# EAGLE board OoffAttSMD (EAGLE 9.3.0)
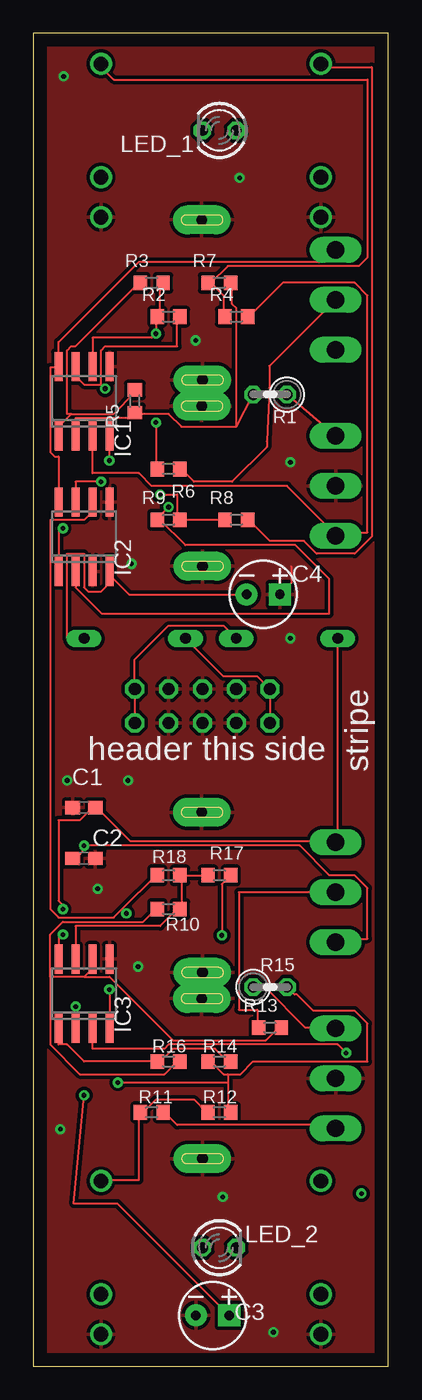
[diagram p0: board, top side]
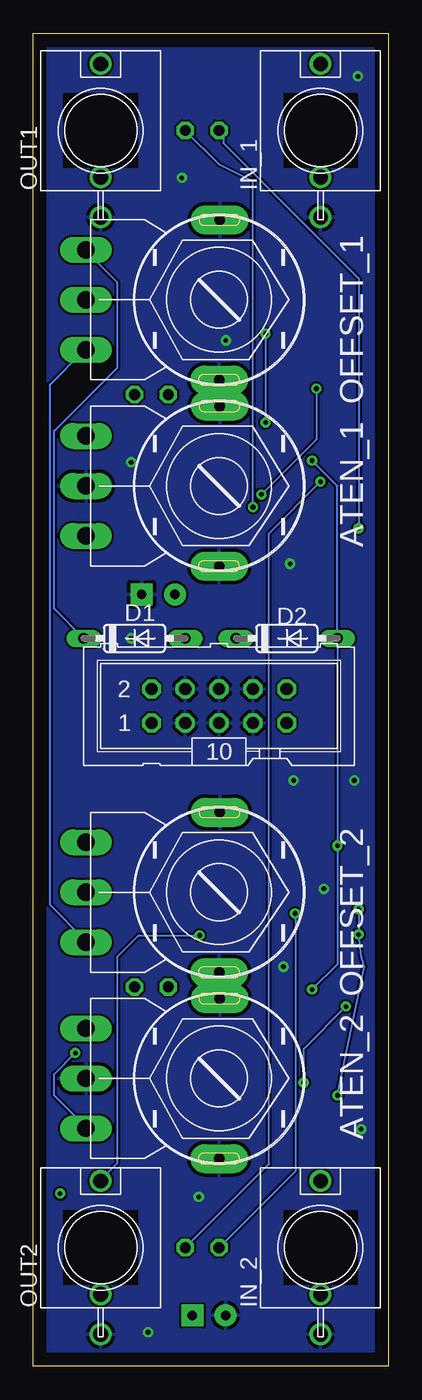
[diagram p1: board, bottom side, seen from below]

Size 26.65 x 100 mm. Coordinates in mm from the lower left corner, seen from the top.
Outline: 0,0 26.65,0 26.65,100 0,100 0,0
Copper layers (1*16): Top 0.035mm / dielectric 1.5mm / Bottom 0.035mm
Design rules "default": minimum track width 6mil, minimum drill 0.35mm, track to track 6mil, track to pad 6mil, pad to pad 6mil, via to via 6mil, smd to smd 6mil, copper to edge 40mil, drill to drill 6mil, minimum pad ring 10mil, minimum via ring 8mil, stop-mask expansion 4mil, vias tented up to drill 0mil, thermal gap 10mil

## Footprints (pad centres in the part's own frame; a part is rotated, then mirrored left to right if it is on the bottom)
R121N = drill 0.8 pad 2.184 long: C1 -5.995,0.051; C2 6.021,0 | drill 1.3 pad 1.778 long: PIN1 -3.75,-10; PIN2 0,-10; PIN3 3.75,-10
C0603 = smd 1.1 x 1: 1 -0.85,0; 2 0.85,0
CPOL-RADIAL-2.5MM-5MM = drill 0.7 pad 1.651 square: 1 1.25,0 | drill 0.7 pad 1.651: 2 -1.25,0
DO35-7 = drill 0.813 long: A 3.81,0; C -3.81,0
SO08 = smd 0.6 x 2.2: 1 -1.905,-2.6; 2 -0.635,-2.6; 3 0.635,-2.6; 4 1.905,-2.6; 5 1.905,2.6; 6 0.635,2.6; 7 -0.635,2.6; 8 -1.905,2.6
WQP-PJ301M-12_JACK = drill 1.1: P$1 0,5; P$2 0,-3.5; P$3 0,-6.5
LED3MM = drill 0.813 octagon: A -1.27,0; K 1.27,0
ML10 = drill 0.914 octagon: 1 -5.08,-1.27; 2 -5.08,1.27; 3 -2.54,-1.27; 4 -2.54,1.27; 5 0,-1.27; 6 0,1.27; 7 2.54,-1.27; 8 2.54,1.27; 9 5.08,-1.27; 10 5.08,1.27
0207/2V = drill 0.813 octagon: 1 -1.27,0; 2 1.27,0
R0603 = smd 1 x 1.1: 1 -0.85,0; 2 0.85,0

## Placement (x,y rotation side)
ATEN_1  R1212NPADS_GRANDES  [R121N]  12.7,66.04 270 bottom
ATEN_2  R1212NPADS_GRANDES  [R121N]  12.7,21.59 270 bottom
C1  100n  [C0603]  3.81,41.91 0 top
C2  100n  [C0603]  3.81,38.1 0 top
C3  10uF  [CPOL-RADIAL-2.5MM-5MM]  13.46,3.81 0 top
C4  10uF  [CPOL-RADIAL-2.5MM-5MM]  17.27,57.91 0 top
D1  [DO35-7]  19.05,54.61 0 bottom
D2  [DO35-7]  7.62,54.61 0 bottom
IC1  TL072D  [SO08]  3.81,72.39 0 top
IC2  TL072D  [SO08]  3.81,62.23 0 top
IC3  TL072D  [SO08]  3.81,27.94 0 top
IN_1  WQP-PJ301M-12_JACK  [WQP-PJ301M-12_JACK]  5.08,92.71 0 bottom
IN_2  WQP-PJ301M-12_JACK  [WQP-PJ301M-12_JACK]  5.08,8.89 0 bottom
LED_1  [LED3MM]  13.97,92.71 180 top
LED_2  [LED3MM]  13.97,8.89 0 top
OFFSET_1  R1212NPADS_GRANDES  [R121N]  12.7,80.01 270 bottom
OFFSET_2  R1212NPADS_GRANDES  [R121N]  12.7,35.56 270 bottom
OUT1  WQP-PJ301M-12_JACK  [WQP-PJ301M-12_JACK]  21.59,92.71 0 bottom
OUT2  WQP-PJ301M-12_JACK  [WQP-PJ301M-12_JACK]  21.59,8.89 0 bottom
POWER  [ML10]  12.7,49.53 0 bottom
R1  43k  [0207/2V]  17.78,72.9 180 top
R2  10k  [R0603]  10.16,78.74 0 top
R3  10k  [R0603]  8.89,81.28 0 top
R4  100k  [R0603]  15.24,78.74 0 top
R5  100k  [R0603]  7.62,72.39 90 top
R6  10k  [R0603]  10.16,67.31 180 top
R7  100k  [R0603]  13.97,81.28 0 top
R8  1k  [R0603]  15.24,63.5 0 top
R9  3k  [R0603]  10.16,63.5 0 top
R10  10k  [R0603]  10.16,34.29 0 top
R11  100k  [R0603]  8.89,19.05 0 top
R12  100k  [R0603]  13.97,19.05 0 top
R13  10k  [R0603]  17.78,25.4 0 top
R14  100k  [R0603]  13.97,22.86 0 top
R15  43k  [0207/2V]  17.78,28.45 0 top
R16  10k  [R0603]  10.16,22.86 0 top
R17  1k  [R0603]  13.97,36.83 0 top
R18  3k  [R0603]  10.16,36.83 0 top

## Library data of the parts
ATEN_1 ATEN_2 OFFSET_1 OFFSET_2 = pot_12mm_r1212n
C1 C2 R1 R15 = resistor
C3 C4 = SparkFun-Capacitors; PROD_ID: CAP-08440
D1 D2 = diode
IC1-IC3 = linear
IN_1 IN_2 OUT1 OUT2 = thonkiconn
LED_1 LED_2 = led
POWER = con-ml; OC_FARNELL: unknown; OC_NEWARK: unknown
R2-R14 R16-R18 = adafruit

## Nets
+12V: C1.2 C3.1 D1.C IC1.8 IC2.8 IC3.8 OFFSET_1.PIN1 OFFSET_2.PIN1
-12V: C2.1 C4.2 D2.A IC1.4 IC2.4 IC3.4 OFFSET_1.PIN3 OFFSET_2.PIN3
GND: ATEN_1.C1 ATEN_1.C2 ATEN_1.PIN2 ATEN_2.C1 ATEN_2.C2 ATEN_2.PIN2 C1.1 C2.2 C3.2 C4.1 IC1.5 IC2.3 IC2.5 IC3.5 IN_1.P$3 IN_2.P$3 OFFSET_1.C1 OFFSET_1.C2 OFFSET_2.C1 OFFSET_2.C2 OUT1.P$3 OUT2.P$3 POWER.3 POWER.4 POWER.5 POWER.6 POWER.7 POWER.8
N$1: D1.A POWER.9 POWER.10
N$2: D2.C POWER.1 POWER.2
N$3: IC2.1 LED_1.K
N$4: IC3.2 R12.2 R14.1 R15.2
N$5: ATEN_2.PIN3 IC3.3 R11.2
N$6: IC3.1 R14.2 R16.1
N$7: IN_2.P$1 R11.1 R12.1
N$8: IC3.6 R10.1 R13.2 R16.2
N$9: IC3.7 R10.2 R17.1 R18.2
N$10: OFFSET_2.PIN2 R13.1
N$11: ATEN_2.PIN1 R15.1
N$12: OUT2.P$1 R17.2
N$13: IC1.2 R1.2 R5.1 R7.2
N$14: OUT1.P$1 R8.2
N$16: ATEN_1.PIN3 IC1.3 R4.2
N$17: IC2.7 LED_2.K
N$18: IC2.6 LED_2.A R18.1
N$36: IC2.2 LED_1.A R9.1
N$61: ATEN_1.PIN1 R1.1
N$62: IC1.1 R3.1 R5.2
N$63: IN_1.P$1 R4.1 R7.1
N$64: IC1.6 R2.1 R3.2 R6.2
N$65: IC1.7 R2.2 R8.1 R9.2
N$68: OFFSET_1.PIN2 R6.1

## Tracks (layer width: path | path; a pad name or v marks a point on that pad's centre or on a via)
+12V  (via drill 0.35)
  Top 0.152: IC2.8 1.91,68.26 1.59,68.26 1.27,68.58 1.27,74.93 1.91,74.93 IC1.8 1.91,76.83 7.94,82.87 21.91,82.87 22.54,83.5 OFFSET_1.PIN1 | IC3.8 1.91,32.38 v2.22,32.38 | v2.22,34.29 2.22,34.35 2.22,34.61 1.91,34.92 1.91,40.96 3.49,40.96 4.45,41.91 C1.2 4.76,41.91 7.3,39.37 22.54,39.37 OFFSET_2.PIN1 22.86,39.37 D1.C | C3.1 6.33,12.19 3.05,12.19 v3.81,20.32
  Bottom 0.152: v2.22,34.29 v2.22,32.38 2.03,30.73 1.78,29.97 v3.81,20.32 | D1.C 25.08,56.83 25.08,70.17 20.32,74.93 20.32,81.28 22.54,83.5 OFFSET_1.PIN1
-12V  (via drill 0.35)
  Top 0.152: C4.2 7.18,57.91 6.03,59.05 | 6.03,59.05 5.71,59.37 IC2.4 | v5.71,28.26 IC3.4 | v5.71,67.94 IC1.4 | 6.03,59.05 5.08,58.1 4.13,58.1 3.81,58.42 3.81,60.96 2.54,60.96 2.54,54.61 D2.A | 4.13,39.05 3.17,38.1 C2.1 | 4.13,39.05 20,39.05 22.23,36.83 24.13,36.83 25.08,35.88 25.08,32.07 22.86,32.07 OFFSET_2.PIN3 | 4.13,39.05 v3.81,39.05
  Bottom 0.152: v5.71,28.26 3.81,30.16 v3.81,39.05 D2.A 3.81,66.04 v5.71,67.94 | OFFSET_1.PIN3 22.86,76.2 25.4,73.66 25.4,34.61 22.86,32.07 OFFSET_2.PIN3
GND  (via drill 0.35)
  Top 0.152: 19.37,60.01 19.37,58.76 C4.1 | 5.71,74.93 IC1.5 | 3.17,41.91 C1.1 | 12.83,3.81 C3.2 | 5.71,30.48 IC3.5
  other vias: 4.83,35.81 2.54,43.94 7.11,43.94 7.87,29.97 2.03,17.78 14.22,12.7 18.03,2.54 19.3,54.61 19.3,67.82 12.19,76.96 15.49,89.15 2.29,96.77 7.37,60.2
  pour Top (isolate 0.254): 0,100.33 26.67,100.33 26.67,0 0,0
  pour Bottom: 0,100.33 26.67,100.33 26.67,0 0,0
N$1
  Top 0.152: D1.A 14.29,55.56 10.16,55.56 7.62,53.02 POWER.10 POWER.9
N$2
  Top 0.152: D2.C 14.29,51.75 16.83,51.75 POWER.2 POWER.1
N$3  (via drill 0.35)
  Top 0.152: IC2.1 1.91,62.87 v2.22,62.87
  Bottom 0.152: v2.22,62.87 2.22,81.6 12.38,91.76 12.38,92.39 LED_1.K
N$4  (via drill 0.35)
  Top 0.152: 14.61,21.91 14.61,21.27 | 14.61,21.27 14.61,19.05 R12.2 | 14.61,21.91 14.29,21.91 13.34,22.86 R14.1 | 14.61,21.91 15.56,21.91 16.51,22.86 25.08,22.86 25.08,25.72 24.13,26.67 21.02,26.67 19.81,27.88 19.62,27.88 R15.2 | v3.17,26.99 IC3.2 | 14.61,21.27 v6.35,21.27
  Bottom 0.152: v3.17,26.99 6.35,23.81 v6.35,21.27
N$5  (via drill 0.35)
  Top 0.152: R11.2 9.84,19.05 10.79,18.1 22.54,18.1 ATEN_2.PIN3 | IC3.3 4.45,23.81 9.84,23.81 10.16,24.13 22.86,24.13 v23.5,23.5
  Bottom 0.152: v23.5,23.5 25.08,21.91 25.08,20.32 22.86,18.1 ATEN_2.PIN3
N$6
  Top 0.152: R14.2 14.61,22.86 13.65,23.81 10.48,23.81 9.53,22.86 R16.1 3.81,22.86 2.54,24.13 1.91,24.13 IC3.1
N$7
  Top 0.152: IN_2.P$1 5.08,13.97 7.94,13.97 7.94,19.05 R11.1 8.26,19.05 9.21,20 12.06,20 13.02,19.05 R12.1
N$8
  Top 0.152: 1.27,29.21 1.27,32.38 2.22,33.34 8.26,33.34 9.21,34.29 R10.1 | 3.81,29.21 1.27,29.21 | 3.81,29.21 4.45,29.84 IC3.6 | 1.27,29.21 1.27,24.13 3.49,21.91 9.84,21.91 10.79,22.86 R16.2 | 3.81,29.21 5.71,29.21 10.48,24.45 17.46,24.45 18.41,25.4 R13.2
N$9
  Top 0.152: 11.11,36.83 11.11,34.29 R10.2 10.79,34.29 9.53,33.02 3.17,33.02 IC3.7 | 11.11,36.83 R17.1 | 11.11,36.83 R18.2
N$10
  Top 0.152: OFFSET_2.PIN2 15.43,35.56 15.43,26.73 16.83,26.73 16.83,25.4 R13.1
N$11
  Top 0.152: R15.1 17.4,28.45 20.45,25.4 22.54,25.4 ATEN_2.PIN1
N$12  (via drill 0.35)
  Top 0.152: R17.2 14.16,36.17 v14.16,32.32
  Bottom 0.152: v14.16,32.32 18.73,32.32 20.32,30.73 20.32,15.24 21.59,13.97 OUT2.P$1
N$13
  Top 0.152: 7.62,71.44 10.16,71.44 11.11,70.48 15.24,70.48 | 15.24,70.48 15.24,79.38 14.92,79.69 14.92,81.28 R7.2 | IC1.2 3.17,71.12 7.3,71.12 7.62,71.44 | 7.62,71.44 R5.1 | 15.24,70.48 R1.2
N$14
  Top 0.152: R8.2 16.19,63.5 17.78,61.91 20.32,61.91 21.27,60.96 24.13,60.96 25.4,62.23 25.4,97.47 21.59,97.47 OUT1.P$1
N$16
  Top 0.152: R4.2 16.19,78.74 18.73,81.28 24.13,81.28 25.08,80.33 25.08,62.55 22.86,62.55 ATEN_1.PIN3 22.54,62.55 19.05,66.04 8.89,66.04 7.94,66.99 4.45,66.99 IC1.3
N$17  (via drill 0.35)
  Top 0.152: IC2.7 3.17,66.36 v5.08,66.36
  Bottom 0.152: v5.08,66.36 8.95,62.48 8.95,15.18 LED_2.K
N$18  (via drill 0.35)
  Top 0.152: 6.67,34.29 6.03,33.66 1.91,33.66 1.27,34.29 1.27,63.5 3.81,63.5 4.45,64.14 IC2.6 | 6.67,34.29 9.21,36.83 R18.1 | 6.67,34.29 v6.99,33.97
  Bottom 0.152: LED_2.A 6.99,14.61 v6.99,33.97
N$19  (via drill 0.35)
  other vias: 24.64,12.95
N$36  (via drill 0.35)
  Top 0.152: IC2.2 3.17,58.42 5.14,56.45 22.23,56.45 22.23,59.05 19.68,61.59 11.43,61.59 9.53,63.5 R9.1 9.21,63.5 v10.16,64.45
  Bottom 0.152: LED_1.A 12.7,90.17 10.16,88.9 v10.16,64.45
N$61
  Top 0.152: ATEN_1.PIN1 R1.1
N$62
  Top 0.152: 2.86,71.44 6.03,71.44 7.62,73.03 R5.2 | 2.86,71.44 1.91,70.48 IC1.1 | 2.86,71.44 2.54,71.44 2.54,76.2 2.86,76.52 3.17,76.52 7.94,81.28 R3.1
N$63
  Top 0.152: 13.34,81.28 14.29,80.33 14.29,78.74 R4.1 | 13.34,81.28 14.61,82.55 24.45,82.55 25.08,83.19 25.08,96.52 6.03,96.52 5.08,97.47 IN_1.P$1 | 13.34,81.28 R7.1
N$64  (via drill 0.35)
  Top 0.152: v9.21,70.8 9.21,67.31 R6.2 | R3.2 9.53,81.28 9.53,78.74 R2.1 9.21,78.74 v9.21,77.47 8.89,77.15 4.45,77.15 IC1.6
  Bottom 0.152: v9.21,77.47 v9.21,70.8
N$65  (via drill 0.35)
  Top 0.152: R8.1 R9.2 10.79,63.5 10.79,65.41 v9.53,65.41 | 5.08,73.66 5.08,76.2 5.4,76.52 10.79,76.52 10.79,78.74 R2.2 | 5.08,73.66 3.81,73.66 3.17,74.3 IC1.7 | 5.08,73.66 v5.4,73.34
  Bottom 0.152: v9.53,65.41 5.4,69.53 v5.4,73.34
N$68
  Top 0.152: OFFSET_1.PIN2 17.73,75.04 17.73,73.42 17.53,69.41 17.53,68.96 14.92,66.36 12.06,66.36 11.11,67.31 R6.1

## Text on the board
tNames: stripe | header this side